# Altium PCB NPCarm.PcbDoc
Units mil, origin at the board's own origin, x right, y up, seen from the top; angles counter-clockwise.
Board outline 5790 x 5400 mil, 2 copper layers (Top Layer, Bottom Layer); 70 components, 41 nets, 201 pads, 381 vias.
Unrouted connection lines stored in the file: 1.
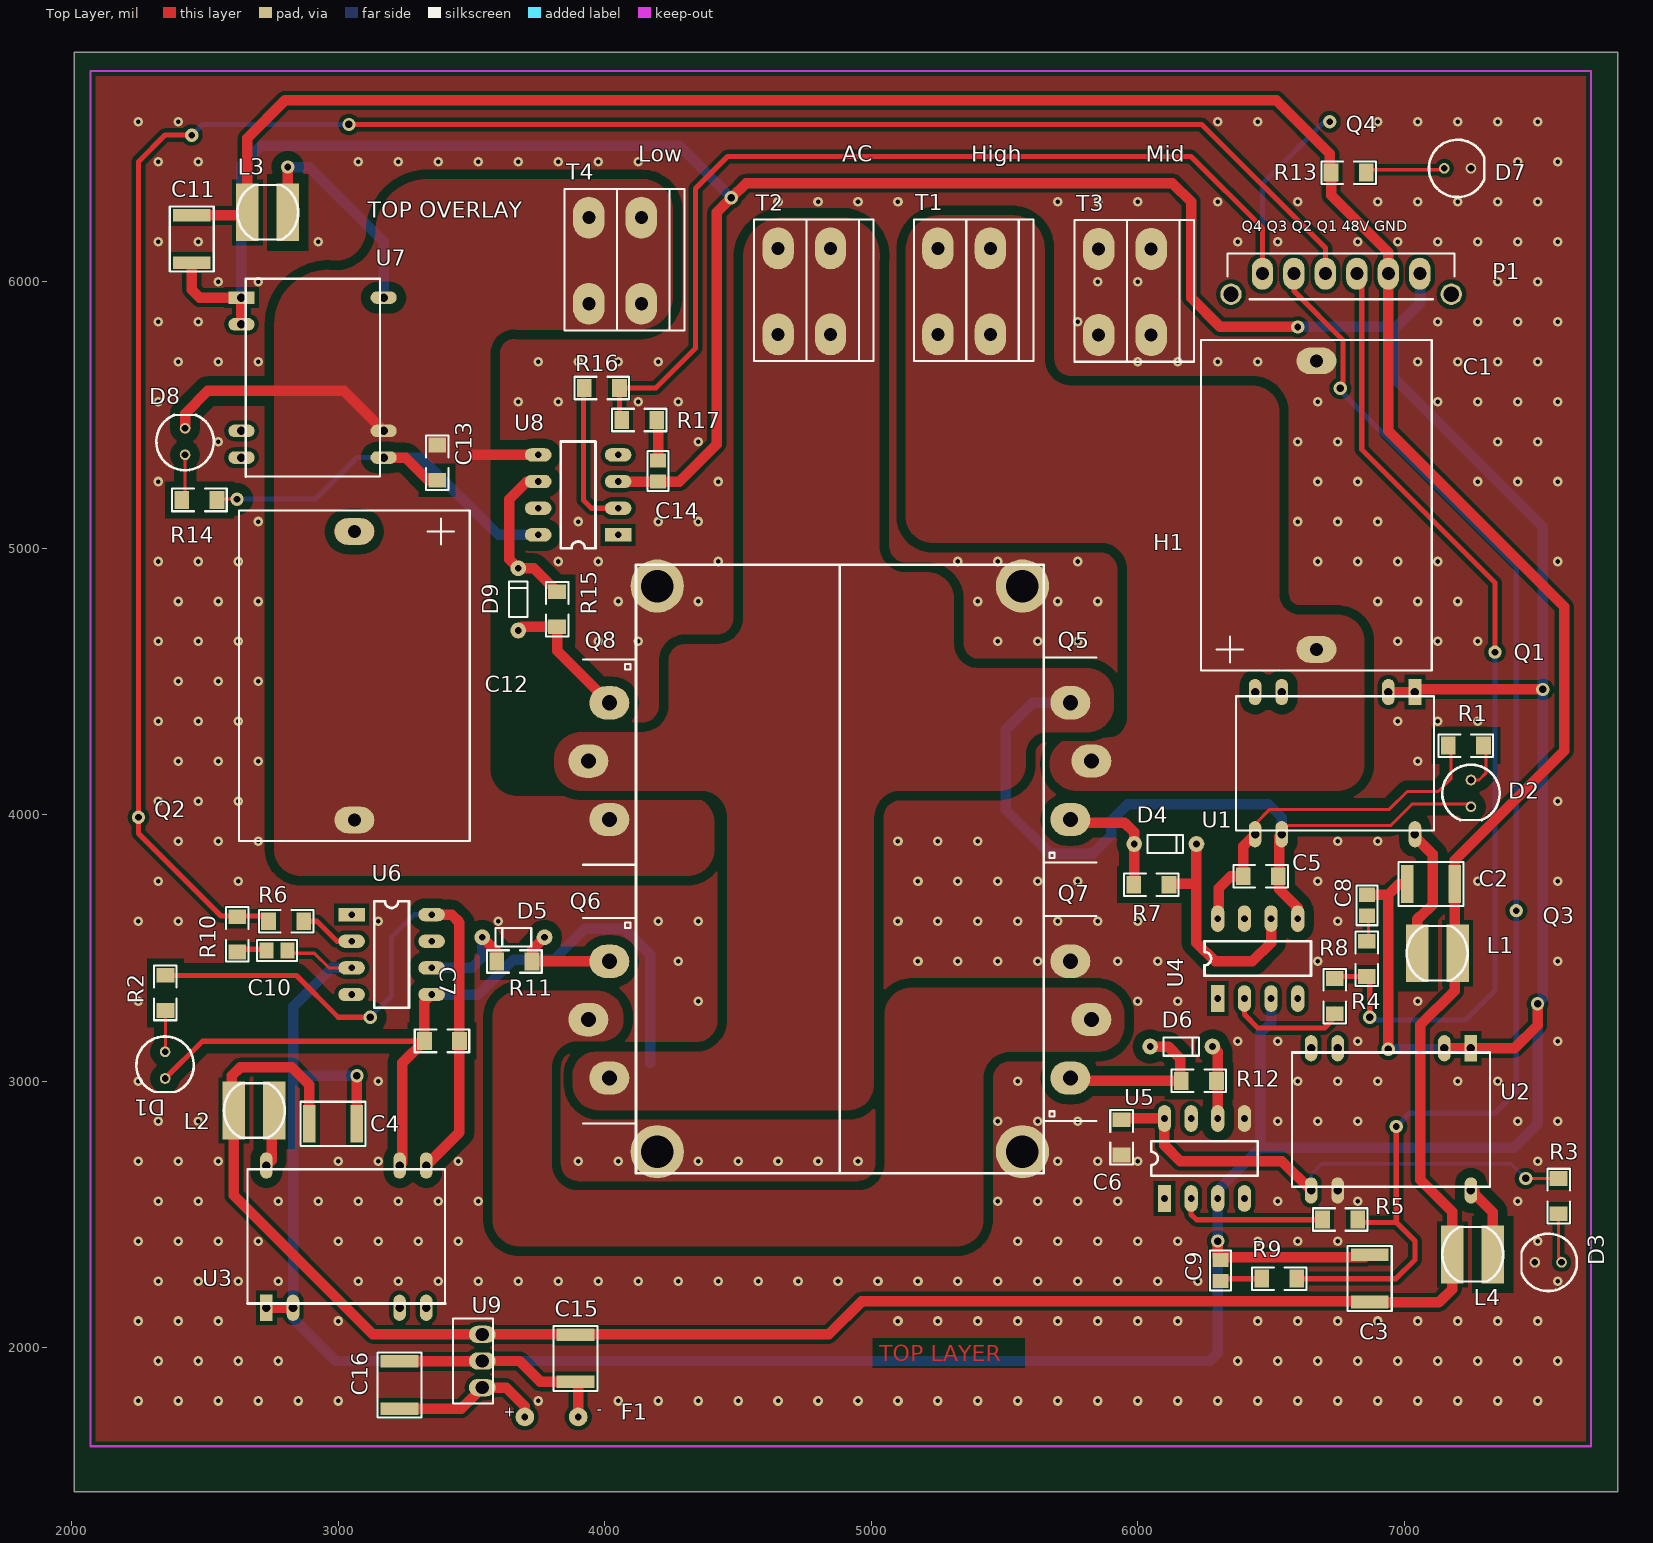
[diagram p0: Top Layer view]
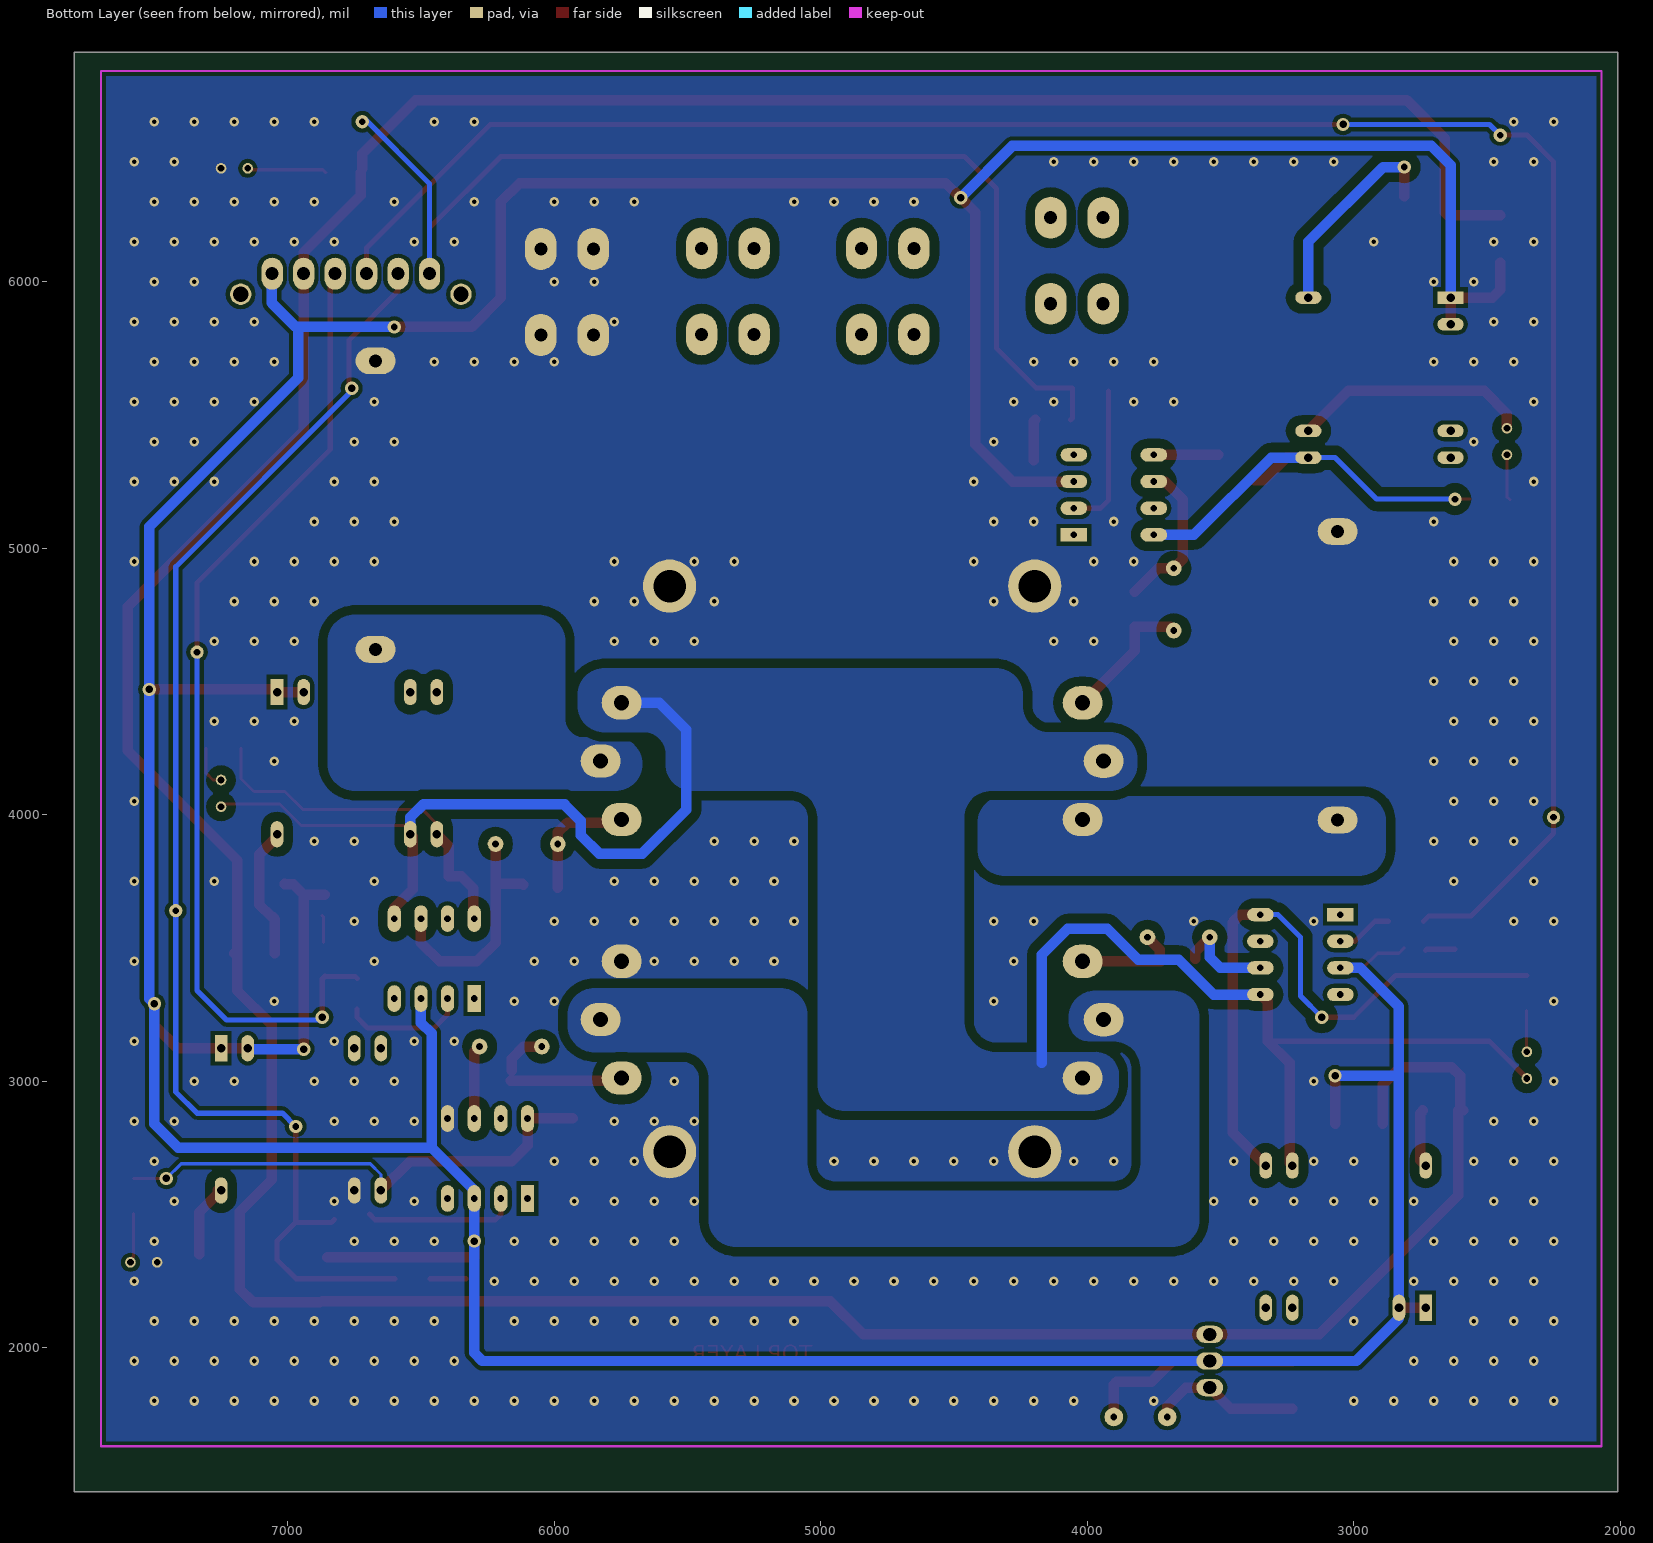
[diagram p1: Bottom Layer view, seen from below]

## Layer stack, top to bottom
Top Solder: solder mask 0.4, Solder Resist, Dk 3.5
Top Layer: signal copper 1.4
Dielectric 1: dielectric 12.6, FR-4, Dk 4.8
Bottom Layer: signal copper 1.4
Bottom Solder: solder mask 0.4, Solder Resist, Dk 3.5

## Board outline
2010,1460 7800,1460 7800,6860 2010,6860

## Design rules (kind name [scope] priority, off if disabled: settings)
BoardOutlineClearance [All] p1: gap=10 ignorepadtopadclearanceinfootprint=FALSE except(0: Arc-SplitContinuation Track-SplitContinuation SMDPad-SplitContinuation THPad-SplitContinuation Via-SplitContinuation Fill-SplitContinuation Poly-SplitContinuation Region-SplitContinuation Text-SplitContinuation)
Clearance ClearanceHV [InNetClass('HV')] p1: gap=35 ignorepadtopadclearanceinfootprint=FALSE except(0: Arc-Hole Track-Hole SMDPad-Hole THPad-Hole Via-Hole Fill-Hole Poly-Hole Region-Hole Text-Hole)
Clearance [All] p2: gap=15 ignorepadtopadclearanceinfootprint=FALSE except(0: Arc-Hole Track-Hole SMDPad-Hole THPad-Hole Via-Hole Fill-Hole Poly-Hole Region-Hole Text-Hole)
ComponentClearance [All] p1: gap=10 collisioncheckmode=3 verticalgap=100000 showdistances=FALSE
Height [All] p1: minheight=0 maxheight=30000 prefheight=500
HoleSize [All] p1: absolutevalues=TRUE maxlimit=500 minlimit=1 maxpercent=80.000 minpercent=20.000
PolygonConnect [All] p1: connectstyle=Direct reliefconductorwidth=10 reliefentries=4 polygonreliefangle="90 Angle" airgapwidth=10
RoutingVias [All] p1: holewidth=28 width=50 viastyle="Through Hole" minholewidth=10 minwidth=50 maxholewidth=50 maxwidth=100
SilkToSolderMaskClearance [IsPad] p1: minsilkscreentomaskgap=4 clearancetoexposedcopper=TRUE
SolderMaskExpansion [All] p1: expansion=4
Width [All] p1: maxlimit=40 minlimit=10 preferedwidth=10
26 further rules are at their usual default settings.

## Classes and differential pairs
net class HV: NetC1_1 NetC5_1 NetC5_2 NetC7_2 NetC12_2 NetC13_2 NetD1_1 NetD2_1 NetD4_1 NetD4_2 NetD5_1 NetD5_2 NetD6_1 NetD6_2 NetD8_1 NetD9_1 NetD9_2 NetL1_2 NetL2_2 NetL3_2 NetL4_2 NetQ6_2

## Components (designator, comment, footprint, x,y, rotation, side; value= is the part's Value field where it differs from the comment)
C1 "Cap Pol1" B32674D3126K000 6670,4620 r90 top
C2 "Cap" C4532 7100,3740 r0 top
C3 "Cap" C4532 6870,2260 r270 top
C4 "Cap" C4532 2980,2840 r180 top
C5 "Cap" R_1206 6460,3770 r90 top
C6 "Cap" R_1206 5940,2790 r0 top
C7 "Cap" R_1206 3390,3150 r270 top
C8 "Cap" "Capacitor 0805 - duplicate" 6860,3660 r270 top
C9 "Cap" "Capacitor 0805 - duplicate" 6310,2290 r270 top
C10 "Cap" "Capacitor 0805 - duplicate" 2770,3490 r180 top
C11 "Cap" C4532 2450,6160 r90 top
C12 "Cap Pol1" B32674D3126K000 3060,5062.68 r270 top
C13 "Cap" R_1206 3370,5320 r180 top
C14 "Cap" "Capacitor 0805 - duplicate" 4200,5290 r90 top
C15 "Cap" C4532 3890,1960 r90 top
C16 "Cap" C4532 3230,1860 r90 top
D1 "LED" LED 2350,3110 r270 top
D2 "LED" LED 7250,4130 r270 top
D3 "LED" LED 7590,2320 r180 top
D4 "1N4148" DO-35_02 6220,3924.45 r180 top
D5 "1N4148" DO-35_02 3540,3505.55 r0 top
D6 "1N4148" DO-35_02 6280,3164.45 r180 top
D7 "LED" LED 7150,6425 r0 top
D8 "LED" LED 2425,5350 r90 top
D9 "1N4148" DO-35_02 3640.55,4925 r270 top
F1 "12Fan" "12V Fan" 3700,1740 r0 top
H1 "Heatsink" "Dual C40" 5567,4858 r180 top
L1 "Inductor" TCK-047 7005.12,3590.24 r270 top
L2 "Inductor" TCK-047 2803.31,2779.76 r90 top
L3 "Inductor" TCK-047 2853.31,6149.76 r90 top
L4 "Inductor" TCK-047 7374.88,2239.76 r90 top
P1 "Header 6" "3.00mm Male Header" 6467.56,6030 r0 top
Q1 "Testpoint" Testpoint 7340,4610 r90 top
Q2 "Testpoint" Testpoint 2250,3990 r90 top
Q3 "Testpoint" Testpoint 7420,3640 r90 top
Q4 "Testpoint" Testpoint 6720,6600 r90 top
Q5 "IXFK 34N80" TO-247 5747,4420 r270 top
Q6 "IXFK 34N80" TO-247 4017,3012 r90 top
Q7 "IXFK 34N80" TO-247 5747,3450 r270 top
Q8 "IXFK 34N80" TO-247 4017,3982 r90 top
R1 "980" R_1206 7230,4260 r90 top
R2 "980" R_1206 2350,3330 r180 top
R3 "980" R_1206 7580,2570 r0 top
R4 "Value" R_1206 6740,3320 r0 top
R5 "Value" R_1206 6760,2480 r270 top
R6 "Value" R_1206 2803.07,3600.98 r90 top
R7 "1" R_1206 6049.74,3738.2 r90 top
R8 "Value" R_1206 6860,3460 r0 top
R9 "Value" R_1206 6530,2260 r90 top
R10 "Value" R_1206 2620,3550 r180 top
R11 "1" R_1206 3660,3450 r90 top
R12 "1" R_1206 6230,3000 r270 top
R13 "4.58k" R_1206 6790,6410 r90 top
R14 "980" R_1206 2480,5180 r270 top
R15 "1" R_1206 3820,4770 r180 top
R16 "Value" R_1206 3990,5600 r270 top
R17 "Value" R_1206 4130,5480 r270 top
T1 "1991095" "Terminal Pad" 5250,5802.17 r0 top
T2 "1991095" "Terminal Pad" 4650,5802.17 r0 top
T3 "1991095" "Terminal Pad" 5853.15,5800 r0 top
T4 "1991095" "Terminal Pad" 3940,5917.17 r0 top
U1 "TDR 3-4812" "PID DC-DC Converter - duplicate" 6440,3926.54 r90 top
U2 "TDR 3-4812" "PID DC-DC Converter - duplicate" 6650,2590 r90 top
U3 "TDR 3-4812" "PID DC-DC Converter - duplicate" 3330,2683.46 r270 top
U4 "TLP351H" 11-10C4S 6300,3310 r90 top
U5 "TLP351H" 11-10C4S 6100,2560 r90 top
U6 "TLP351H" 11-10C4S 3050,3625 r0 top
U7 "TDR 3-4812" "PID DC-DC Converter - duplicate" 3170,5340 r180 top
U8 "TLP351H" 11-10C4S 4050,5050 r180 top locked
U9 "R-78HB12-0.5" "R-78HB12-0.5 Footprint" 3540,2050 r270 top

## Footprints (in the part's own frame and the unit in brackets; to place one, negate y for a bottom-side part, rotate by r counter-clockwise, add the part's x,y. Pads: shape width x height; smd on the part's side, far side on the other; paste and mask are expansions set on the pad)
"3.00mm Male Header" [mil] "6 pin header"
  round 80 hole 57: 0(-118.11,-77.17) 0(708.66,-77.17)
  oval 80x120 hole 49: 1(590.55,0) 2(472.44,0) 3(354.33,0) 4(236.22,0) 5(118.11,0) 6(0,0)
  silkscreen extent -131,-96 721,76
11-10C4S [mil]
  rect 100x50 hole 25: 1(0,0)
  oval 100x50 hole 25: 2(0,-100) 3(0,-200) 4(0,-300) 5(300,-300) 6(300,-200) 7(300,-100) 8(300,0)
  silkscreen extent 85,-350 215,50
"12V Fan" [mil] "12V DC Fan"
  round 70 hole 25: 1(0,0) 2(200,0)
B32674D3126K000 [mil] "Film cap"
  oval 100x150 hole 49: 1(0,0) 2(1082.68,0)
  silkscreen extent -79,-433 1161,433
C4532 [mm]
  rect 1.2x3.6 smd: 1(-2.25,0) 2(2.25,0)
  silkscreen extent -3.1,-2.1 3.1,2.1
"Capacitor 0805 - duplicate" [mm]
  rect 1.35x1.55 smd: 1(-1,0) 2(1,0)
  silkscreen extent -1.9,-1 1.9,1
DO-35_02 [mm]
  round 1.5 hole 0.635: 1(0,0.875) 2(5.94,0.875)
  silkscreen extent 1.27,0 4.67,1.75
"Dual C40" [mil] "Heat sink for TO 247 case"
  round 200 hole 122: 1(0,0) 2(0,2123) 3(1370,2123) 4(1370,0)
  silkscreen extent -80,-80 1450,2203
LED [mil] "LED"
  round 40 hole 25: 1(0,0) 2(100,0)
  silkscreen extent -58,-108 150,108
"PID DC-DC Converter - duplicate" [mm]
  rect 2.5x1.2 hole 0.813: 1(13.55,-15.24)
  oval 2.5x1.2 hole 0.813: 2(13.55,-12.7) 6(13.55,-2.54) 7(13.55,0) 8(0,0) 9(0,-2.54) 14(0,-15.24)
  silkscreen extent 0.35,-17.04 13.15,1.8
"R-78HB12-0.5 Footprint" [mil] "Power Supply Footprint"
  oval 65x100 hole 49: 1(0,0) 2(100,0) 3(200,0)
  silkscreen extent -60,-110 260,40
R_1206 [mm]
  rect 1.7x1.4 smd: 1(-0.025,-1.7) 2(-0.025,1.65)
  silkscreen extent -1.1,-2.63 1.05,2.58, body extent -0.81,-1.68 0.8,1.68, height 1.1
TCK-047 [mm]
  rect 5.5x2.15 smd: 1(2.8,4.95) 2(2.8,1.1)
  silkscreen extent 0.2,0.1 5.4,5.9
"Terminal Pad" [mm]
  oval 3x4 hole 1.245: 1(0,0) 1(0,8.2) 2(5,0) 2(5,8.2)
  silkscreen extent -2.3,-2.55 9.1,10.95
Testpoint [mil]
  round 50 hole 25: 1(0,0)
TO-247 [mil] "MOSFET Package"
  oval 125x150 hole 57: 1(437.8,0) 2(218.9,78.74) 3(0,0)
  silkscreen extent -170,-100 600,98

## Part data
C1 C12: "Polarized Capacitor (Radial)"
C2 C3 C4 C5 C6 C7 C8 C9 C10 C11 C13 C14 C15 C16: "Capacitor"
D4 D5 D6 D9: "Diode"
H1: library part "C-40 Heatsink", "Dual C-40 Heatsink"
P1: "Header, 6-Pin"
Q5 Q6 Q7 Q8: "MOSFET 34A"
R1 R2 R3 R4 R5 R6 R7 R8 R9 R10 R11 R12 R13 R14 R15 R16 R17: library part RES_SMD1, "RES SMD 1% 1/4W 1206"
T1 T2 T3 T4: library part "Terminal Block 2", "2 way terminal block"
U1 U2 U3 U7: "48V-12V Converter"
U4 U5 U6 U8: "Photocoupler Driver"

## Via types
v1: diameter 36, hole 17, Top Layer to Bottom Layer, 365 vias
v2: diameter 50, hole 28, Top Layer to Bottom Layer, 11 vias
v3: diameter 50, hole 25, Top Layer to Bottom Layer, 5 vias

## Nets (pads, with @x,y where several pads share a name; then routed paths per layer and width w, separated by ;. In a path a pad name is that pad's centre, name@x,y a point inside that pad or via, vN(x,y) a via of type N, cw(c..) or ccw(c..) an arc to the next point about the centre after c; other vN are vias at no path point)
12V: C6.2 R3.2 U2.8 U5.8 | length 1918.8
  Top Layer w11.81: v2(7455.04,2634.96) R3.2
  Top Layer w39.37: C6.2@5930,2860 U5.8 6100,2760 6160,2700 6540,2700 U2.8
  Bottom Layer w11.81: U2.8 6650,2650 6690,2690 7400,2690 v2(7455.04,2634.96)
48V: C2.2 C3.2 C4.2 C11.2 C15.2 L1.1 L2.1 L3.1 L4.1 P1.2 R13.2 U9.1 | length 15373.5
  Top Layer w39.37: C11.2 2647.01,6248.58 L3.1 2658.43,6538.43 2800,6680 6520,6680 6720,6480 R13.2@6720,6423.15 ; L2.1@2588.43,2890 2600,2901.57 2600,3020 2632.95,3052.95 2824.97,3052.95 2891.42,2986.51 C4.2 ; L2.1 2608.43,2571.57 3130,2050 U9.1 4840,2050 4965,2175 C3.2@6870,2175 ; R13.2 6725.04,6324.96 6940,6110 6940,5440 7600,4780 7600,4240 7188.58,3828.58 C2.2 L1.1@7188.58,3491.42 ; C3.2@6881.42,2170 7130,2170 7180,2220 L4.1 7180,2510 7060,2630 7060,3211.42 7188.58,3340 L1.1@7188.58,3491.42 ; L1.1 L1.1@7188.58,3491.42
GND: C1.2 C6.1 C12.1 D3.2 D7.2 H1.1 H1.2 H1.3 H1.4 Q7.3 T3.1 T3.2 U2.9 U5.5
  other v1: 2250,1800 2400,1800 2550,1800 2700,1800 2850,1800 3000,1800 3750,1800 4050,1800 4200,1800 4350,1800 4500,1800 4650,1800 4800,1800 4950,1800 5100,1800 5250,1800 5400,1800 5550,1800 5700,1800 5850,1800 6000,1800 6150,1800 6300,1800 6450,1800 6600,1800 6750,1800 6900,1800 7050,1800 7200,1800 7350,1800 7500,1800 2325,1950 2475,1950 2625,1950 2775,1950 6375,1950 6525,1950 6675,1950 6825,1950 6975,1950 7125,1950 7275,1950 7425,1950 7575,1950 2250,2100 2400,2100 2550,2100 3000,2100 5100,2100 5250,2100 5400,2100 5550,2100 5700,2100 5850,2100 6000,2100 6150,2100 6450,2100 6600,2100 6750,2100 6900,2100 7050,2100 7200,2100 7350,2100 7500,2100 2325,2250 2475,2250 2625,2250 2775,2250 3075,2250 3225,2250 3375,2250 3525,2250 3675,2250 3825,2250 3975,2250 4125,2250 4275,2250 4425,2250 4575,2250 4725,2250 4875,2250 5025,2250 5175,2250 5325,2250 5475,2250 5625,2250 5775,2250 5925,2250 6075,2250 6225,2250 7575,2250 2250,2400 2400,2400 2550,2400 2700,2400 3000,2400 3150,2400 3300,2400 3450,2400 5550,2400 5700,2400 5850,2400 6000,2400 6150,2400 6450,2400 6600,2400 6750,2400 7500,2400 2325,2550 2475,2550 2775,2550 2925,2550 3075,2550 3225,2550 3375,2550 3525,2550 5475,2550 5625,2550 5775,2550 5925,2550 6525,2550 6825,2550 7425,2550 2250,2700 2400,2700 2550,2700 3000,2700 3150,2700 3450,2700 3900,2700 4050,2700 4350,2700 4500,2700 4650,2700 4800,2700 4950,2700 5700,2700 5850,2700 6000,2700 7500,2700 2325,2850 2475,2850 5475,2850 5625,2850 5775,2850 6525,2850 6675,2850 6825,2850 7425,2850 7575,2850 2250,3000 3150,3000 5550,3000 6600,3000 6750,3000 6900,3000 7200,3000 7350,3000 6375,3150 6525,3150 6825,3150 7575,3150 2250,3300 4350,3300 6000,3300 6150,3300 7050,3300 4275,3450 5175,3450 5325,3450 5475,3450 5625,3450 5925,3450 6075,3450 6675,3450 7575,3450 2250,3600 2400,3600 3150,3600 3600,3600 4200,3600 4350,3600 5100,3600 5250,3600 5400,3600 5550,3600 5700,3600 5850,3600 6000,3600 6750,3600 2325,3750 2625,3750 5175,3750 5325,3750 5475,3750 5625,3750 5775,3750 6675,3750 7275,3750 7575,3750 2400,3900 2550,3900 2700,3900 5100,3900 5250,3900 5400,3900 6750,3900 6900,3900 2325,4050 2475,4050 2625,4050 7575,4050 2400,4200 2550,4200 2700,4200 7050,4200 2325,4350 2475,4350 2625,4350 6975,4350 7125,4350 7275,4350 2400,4500 2550,4500 2700,4500 2325,4650 2475,4650 2625,4650 3975,4650 4125,4650 5475,4650 5625,4650 5775,4650 6975,4650 7125,4650 7275,4650 2400,4800 2550,4800 2700,4800 4050,4800 4350,4800 5400,4800 5700,4800 5850,4800 6900,4800 7050,4800 7200,4800 2325,4950 2475,4950 2625,4950 3825,4950 3975,4950 4425,4950 5325,4950 5475,4950 5775,4950 6675,4950 6825,4950 6975,4950 7125,4950 7575,4950 2700,5100 3900,5100 4200,5100 4350,5100 6600,5100 6750,5100 6900,5100 2325,5250 4425,5250 6675,5250 6825,5250 7275,5250 7425,5250 7575,5250 2550,5400 4350,5400 6600,5400 6750,5400 7350,5400 7500,5400 2325,5550 3675,5550 3825,5550 4125,5550 4275,5550 6675,5550 7125,5550 7275,5550 7425,5550 7575,5550 2400,5700 2550,5700 2700,5700 3750,5700 3900,5700 4050,5700 4200,5700 6000,5700 6150,5700 6300,5700 6450,5700 7050,5700 7200,5700 7350,5700 7500,5700 2325,5850 2475,5850 5775,5850 7125,5850 7275,5850 7425,5850 7575,5850 2550,6000 2700,6000 5850,6000 6000,6000 7350,6000 7500,6000 2325,6150 2475,6150 2925,6150 6375,6150 6525,6150 6825,6150 6975,6150 7125,6150 7275,6150 7425,6150 7575,6150 4650,6300 4800,6300 4950,6300 5100,6300 5700,6300 5850,6300 6000,6300 6300,6300 6600,6300 6900,6300 7050,6300 7200,6300 7350,6300 7500,6300 2325,6450 2475,6450 3075,6450 3225,6450 3375,6450 3525,6450 3675,6450 3825,6450 3975,6450 4125,6450 7425,6450 7575,6450 2250,6600 2400,6600 6300,6600 6450,6600 6900,6600 7050,6600 7200,6600 7350,6600 7500,6600
NetC1_1: C1.1 Q5.2 T1.1 T1.2
NetC5_1: C5.1 C7.1 D1.2 D2.2 Q5.3 Q6.3 Q8.2 T2.1 T2.2 U1.9 U3.9 U4.5 U6.5 | length 6106.2
  Top Layer w11.81: U1.9@6540,3950 6550,3960 6950,3960 7030,4040 7240,4040 D2.2
  Top Layer w19.68: D1.2 2490,3150 C7.1@3322.09,3150
  Top Layer w39.37: U3.9 3240,2693.46 3240,3070 3242.09,3070 3322.09,3150 C7.1 3323.07,3298.07 U6.5 ; U1.9 6530,3916.54 6530,3720 6600,3650 U4.5 U4.5@6600,3580
  Bottom Layer w39.37: U6.5 3525,3325 3655.79,3455.79 3808.74,3455.79 3925.46,3572.51 4072.51,3572.51 4170,3475.02 4170,3070 ; Q5.3 5606,4420 5504,4318 5504,4019 5670.44,3852.56 5830,3852.56 5900,3922.56 5900,3976.28 5960,4036.28 5960,4040 6490,4040 6540,3990 U1.9
NetC5_2: C5.2 R1.2 U1.8 U4.8 | length 1361.9
  Top Layer w11.81: U1.8 6440,3965 6495,4020 6943.8,4020 7010.61,4086.81 7126.81,4086.81 7175.04,4135.04 R1.2@7175.04,4249.02
  Top Layer w39.37: U4.8 6304.21,3610 6304.21,3724.21 6349.02,3769.02 C5.2 6395.04,3881.57 U1.8
NetC7_2: C7.2 R2.1 U3.8 U6.8 | length 2432.8
  Top Layer w19.68: R2.1 2843.07,3396.93 3000,3240 v2(3120,3240)
  Top Layer w39.37: U3.8 3454.69,2808.15 3454.69,3595.31 3425,3625 U6.8
  Bottom Layer w19.68: v2(3120,3240) 3200,3320 3200,3540 3285,3625 U6.8
NetC8_2: C8.2 R8.2 | length 101.7
  Top Layer w11.81: R8.2@6864.96,3520.98 6864.96,3615.59 C8.2@6870,3620.63
NetC9_2: C9.2 R9.2 | length 133.4
  Top Layer w19.68: C9.2@6331.61,2259.02 R9.2
NetC10_2: C10.2 R10.2 | length 111.7
  Top Layer w19.68: R10.2@2620.98,3495.04 2725.59,3495.04 C10.2
NetC12_2: C12.2 C13.1 D8.2 Q8.3 T4.1 T4.2 U7.9 U8.5 | length 1139.1
  Top Layer w39.37: D8.2 2425,5505 2510,5590 3020,5590 U7.9 ; 3508.29,5350 U8.5
NetC13_2: C13.2 R14.2 U7.8 U8.8 | length 1606.8
  Top Layer w11.81: R14.2@2564.06,5184.06 v3(2620,5184.06)
  Top Layer w39.37: U7.8 3252.83,5340 3337.8,5255.04 C13.2
  Bottom Layer w19.68: v3(2620,5184.06) 2914.06,5184.06 3070,5340 U7.8
  Bottom Layer w39.37: U7.8 3310,5340 3600,5050 U8.8
NetC14_2: C14.2 R17.2 | length 153.7
  Top Layer w39.37: R17.2 4200,5475.94 C14.2
NetC16_1: C16.1 F1.1 U9.3 | length 571.5
  Top Layer w39.37: C16.1 3461.42,1771.42 U9.3 3630,1850 3700,1780 F1.1
NetD1_1: D1.1 R2.2 | length 155.4
  Top Layer w11.81: D1.1 2350.98,3110.98 R2.2
NetD2_1: D2.1 R1.1 | length 160.2
  Top Layer w11.81: D2.1 7280,4130 7306.93,4156.93 R1.1@7306.93,4249.02
NetD3_1: D3.1 R3.1 | length 170.5
  Top Layer w11.81: R3.1 7579.02,2340.98 D3.1@7585,2335
NetD4_1: D4.1 R7.1 U4.6 | length 852.5
  Top Layer w39.37: R7.1 6119.45,3740 6220,3740 ; D4.1 6220,3740 ; 6500,3560 6500,3520 6430,3450 6290,3450 6220,3520 6220,3740
NetD4_2: D4.2 Q5.1 R7.2 | length 485.6
  Top Layer w39.37: Q5.1@5759.8,3995 Q5.1 5759.2,3970 5950,3970 5986.14,3933.86 D4.2 R7.2@5986.14,3725.55
NetD5_1: D5.1 R11.2 U6.6 | length 385.4
  Top Layer w39.37: D5.1 3595.04,3484.96 R11.2@3595.04,3459.02
  Bottom Layer w39.37: U6.6 3500,3425 3540,3465 D5.1
NetD5_2: D5.2 Q6.1 R11.1 | length 393.5
  Top Layer w39.37: R11.1@3723.95,3449.8 Q6.1 ; R11.1@3726.93,3459.02 3726.93,3493.07 D5.2
NetD6_1: D6.1 R12.2 U5.6 | length 278.3
  Top Layer w39.37: D6.1 6300,3110 U5.6
NetD6_2: D6.2 Q7.1 R12.1 | length 597.6
  Top Layer w39.37: Q7.1 5758.22,3000.98 R12.1 ; D6.2 6113.94,3130 6160,3083.94 6160,3040
NetD7_1: D7.1 R13.1 | length 299.7
  Top Layer w11.81: R13.1 6867.91,6420 7145,6420 D7.1
NetD8_1: D8.1 R14.1 | length 174
  Top Layer w11.81: R14.1 2425,5192.91 D8.1
NetD9_1: D9.1 R15.1 U8.6 | length 591
  Top Layer w39.37: U8.6 3707.49,5250 3641.73,5184.25 3641.73,4958.27 D9.1 3732.91,4925 R15.1
NetD9_2: D9.2 Q8.1 R15.2 | length 518.2
  Top Layer w39.37: D9.2 3688.9,4705.04 R15.2 3820.98,4615.81 Q8.1
NetL1_2: L1.2 U1.14 | length 489.5
  Top Layer w39.37: U1.14@7040,3916.54 7105.91,3850.63 7105.91,3662.66 7057.69,3614.45 7054.45,3614.45 7048.43,3608.43 L1.2
NetL2_2: L2.2 U3.14 | length 219
  Top Layer w39.37: U3.14 2750,2703.46 2750,2880 L2.2@2740,2890
NetL3_2: L3.2 U7.14 | length 796
  Top Layer w39.37: L3.2@2810,6320 v3(2810,6430)
  Bottom Layer w39.37: v3(2810,6430) 2890,6430 3170,6150 U7.14
NetL4_2: L4.2 U2.14 | length 268.4
  Top Layer w39.37: U2.14@7262.95,2590 7262.95,2577.05 7331.57,2508.43 L4.2
NetQ6_2: Q6.2 Q7.2
NetR4_1: R4.1 U4.2 | length 467.3
  Top Layer w19.68: U4.2 6400,3250 6450,3200 6700,3200 6740,3240 R4.1@6740,3270
NetR5_1: R5.1 U5.2 | length 570
  Top Layer w19.68: U5.2 6200,2500 6220,2480 6672.09,2480 R5.1@6693.07,2500.98
NetR6_1: R6.1 U6.2 | length 211.1
  Top Layer w19.68: R6.1 2920,3600 2995,3525 U6.2
NetR16_1: R16.1 U8.2 | length 552.4
  Top Layer w19.68: R16.1@3920,5590 3920,5180 3950,5150 U8.2
Q1: P1.3 Q1.1 R4.2 R8.1 | length 3705.9
  Top Layer w19.68: R4.2 6747.13,3393.07 R8.1 ; P1.3 6840,6011.89 6840,5370 7340,4870 Q1.1 ; R8.1@6860,3394.06 6870,3384.06 v2(6870,3240)
  Bottom Layer w19.68: v2(6870,3240) 6880,3230 7230,3230 7340,3340 Q1.1
Q2: P1.4 Q2.1 R6.2 R10.1 | length 7944.9
  Top Layer w19.68: v3(2450,6550) 2350,6550 2250,6450 Q2.1 2250,3930 2560,3620 2718.11,3620 R6.2 ; v2(3040,6590) 6240,6590 6703.78,6126.22 P1.4
  Bottom Layer w19.68: v3(2450,6550) 2490,6590 v2(3040,6590)
Q3: P1.5 Q3.1 R5.2 R9.1 | length 5074.6
  Top Layer w19.68: P1.5 6585.67,5964.33 6770,5780 v2@6770,5600 ; R9.1 6969.02,2259.02 7040,2330 7040,2400 6970,2470 ; R5.2 6835.94,2470 6970,2470 ; v3(6970,2830) 6970,2470
  Bottom Layer w19.68: v2(6760,5600) 6760,5590 7420,4930 Q3.1 7420,2960 7340,2880 7020,2880 v3(6970,2830)
Q4: P1.6 Q4.1 R16.2 R17.1 | length 4211.1
  Top Layer w19.68: R17.1 4054.96,5489.09 R16.2 4190.98,5600.98 4340,5750 4340,6350 4460,6470 6200,6470 6467.56,6202.44 P1.6
  Bottom Layer w19.68: P1.6 6467.56,6367.56 Q4.1@6710,6610
SigGND: C2.1 C3.1 C4.1 C8.1 C9.1 C10.1 C11.1 C14.1 C15.1 C16.2 F1.2 P1.1 U1.1 U1.2 U2.1 U2.2 U3.1 U3.2 U4.3 U5.3 U6.3 U7.1 U7.2 U8.3 U9.2 | length 22380
  Top Layer w11.81: C10.1@2810,3500 2830,3480 2910,3480 2965,3425 U6.3
  Top Layer w39.37: C11.1 2450,5970 2480,5940 U7.1 U7.2 ; U3.1 U3.2 ; C4.1 3068.58,3018.58 v2(3070,3020) ; C16.2 3538.58,1948.58 U9.2 3680,1950 3758.58,1871.42 C15.1 3900,1861.42 3900,1750 F1.2@3910,1740 ; U8.3 4280,5250 4420,5390 4420,6260 v2(4475,6315) 4530,6370 6130,6370 6200,6300 6200,5940 6310,5830 v3(6600,5830) ; v2@6300,2390 6300,2340 C3.1@6851.42,2340 ; C8.1@6860,3700 6940,3700 ; v2(6940,3120) 6940,3700 ; U1.2 U1.1 7050,4470 v2(7520,4470) ; C2.1 7010.79,3739.37 6979.37,3739.37 6940,3700 ; U2.2 U2.1 7413.46,3123.46 7500,3210 v2(7500,3290)
  Bottom Layer w39.37: U7.1 2636.54,6436.54 2709.69,6509.69 4280.31,6509.69 v2(4475,6315) ; U6.3 2975,3425 2830,3280 2830,3030 ; v2(3070,3020) 2840,3020 2830,3030 ; U4.3 6500,3220 6460,3180 6460,2750 ; v3(6600,5830) 6960,5830 ; v2(6940,3120) 7146.54,3120 U2.2 U2.2@7143.46,3130 ; P1.1 7060,6028.11 7060,5920 6970,5830 6960,5830 ; 2830,3030 U3.2 2830,2110 2990,1950 U9.2 6269.37,1950 6300,1980.63 v2(6300,2400) U5.3 6300,2590 6460,2750 ; 6460,2750 7410,2750 7500,2840 v2(7500,3290) 7520,3310 v2(7520,4470) 7520,5080 6960,5640 6960,5830
pads on no net: P1.0 U1.6 U1.7 U2.6 U2.7 U3.6 U3.7 U4.1 U4.4 U4.7 U5.1 U5.4 U5.7 U6.1 U6.4 U6.7 U7.6 U7.7 U8.1 U8.4 U8.7

## Polygon pours and split planes (outlines as drawn)
GND on Top Layer "gnd_top" (solid, remove dead copper, pour order 72): 1460,7320 8500,7320 8500,6420 8500,1260 1490,1260
NetC12_2 on Top Layer "Top Layer-No Net" (solid, pour order 34): 4255,6270 ccw(c4140.01,6270) 4140,6385 3330,6385 ccw(c3337.49,6187.51) 3140,6180 cw(c2989.62,6194.01) 2965,6045 ccw(c2964.97,5840.03) 2760,5840 2760,3870 ccw(c2860,3870) 2860,3770 3680,3770 ccw(c3680,3870) 3780,3870 3780,4010 ccw(c3720.01,4010.01) 3720,4070 3670,4070 cw(c3670,4170) 3570,4170 3570,5740 cw(c3660,5730) 3670,5820 4140,5820 ccw(c4127.5,5947.5) 4255,5960
NetC5_1 on Top Layer "Top Layer-No Net" (solid, pour order 8): 5480,4090 ccw(c5480,4190) 5580,4190 5580,4230 cw(c5660,4230) 5660,4310 5810,4310 ccw(c5810,4410) 5910,4410 5910,4450 ccw(c5810,4450) 5810,4550 4340,4550 ccw(c4340,4450) 4240,4450 4240,4410 cw(c4140,4410) 4140,4310 3910,4310 ccw(c3910,4210) 3810,4210 3810,4190 ccw(c3910,4190) 3910,4090
NetC12_2 on Top Layer "Top Layer-No Net" (solid, pour order 20): 2970,4070 ccw(c2970,3980) 2880,3980 2880,3870 ccw(c2980,3870) 2980,3770 4310,3770 ccw(c4310,3870) 4410,3870 4410,3970 ccw(c4310,3970) 4310,4070
NetC1_1 on Top Layer "Top Layer-No Net" (solid, pour order 28): 5530,6250 cw(c5525,6125) 5650,6120 5650,5710 ccw(c5750,5710) 5750,5610 6430,5610 cw(c6430,5510) 6530,5510 6530,4390 ccw(c6630,4390) 6630,4290 6680,4290 6680,4130 5840,4130 cw(c5840,4190) 5780,4190 5790,4190 ccw(c5790,4290) 5890,4290 ccw(c5890,4360) 5960,4360 5960,4920 ccw(c5860,4920) 5860,5020 5230,5020 cw(c5230,5120) 5130,5120 5130,6120 cw(c5260,6120) 5260,6250
NetC5_1 on Top Layer "Top Layer-No Net" (solid, pour order 30): 4910,6240 cw(c4885,6095) 5030,6070 5030,5010 ccw(c5130,5010) 5130,4910 5210,4910 cw(c5210,4810) 5310,4810 5310,4640 ccw(c5400,4640) 5400,4550 5500,4550 5500,4530 cw(c5400,4530) 5400,4430 4240,4430 4240,4580 cw(c4300,4580) 4300,4640 4420,4640 ccw(c4420,4740) 4520,4740 4520,6070 cw(c4670,6090) 4650,6240
NetC1_1 on Top Layer "Top Layer-No Net" (solid, pour order 38): 6750,4090 ccw(c6750,4190) 6850,4190 6850,4650 ccw(c6750,4650) 6750,4750 6060,4750 ccw(c6060,4650) 5960,4650 5960,4360.97 cw(c5889.03,4360.97) 5889.03,4290 5770,4290 ccw(c5770,4190) 5670,4190 ccw(c5770,4190) 5770,4090
NetC1_1 on Top Layer "Top Layer-No Net" (solid, pour order 40): 6610,4750 cw(c6610,4830) 6530,4830 6530,4860 6420,4860 ccw(c6420,4760) 6320,4760 6320,4710 ccw(c6420,4710) 6420,4610 6560,4610 ccw(c6560,4700) 6650,4700
NetC5_1 on Top Layer "Top Layer-No Net" (solid, pour order 16): 4910,2890 ccw(c4910,2990) 5010,2990 5010,3990 cw(c5110,3990) 5110,4090 5150,4090 ccw(c5150,4160) 5220,4160 5220,4180 4290,4180 cw(c4290,4200) 4270,4200 4270,4140 ccw(c4320,4140) 4320,4090 4360,4090 cw(c4360,3990) 4460,3990 4460,3230 cw(c4340,3230) 4340,3110 3970,3110 ccw(c3965,3025) 3880,3030 3880,2990 ccw(c3980,2990) 3980,2890
NetQ6_2 on Top Layer "Top Layer-No Net" (solid, pour order 18): 3990,3150 ccw(c3990,3230) 4070,3230 4070,3240 ccw(c3970,3240) 3970,3340 3680,3340 ccw(c3680,3240) 3580,3240 3580,2480 ccw(c3680,2480) 3680,2380 5320,2380 ccw(c5320,2480) 5420,2480 5420,3010 cw(c5520,3010) 5520,3110 5850,3110 ccw(c5850,3210) 5950,3210 5950,3250 ccw(c5850,3250) 5850,3350 5150,3350 ccw(c5150,3250) 5050,3250 5050,2690 cw(c4950,2690) 4950,2590 3900,2590 cw(c3900,2690) 3800,2690 3800,3050 cw(c3900,3050) 3900,3150
GND on Bottom Layer "gnd_bottom" (solid, remove dead copper, pour order 74): 1730,7070 8080,7070 8080,5230 8080,1260 1720,1260
NetC5_1 on Bottom Layer "Top Layer-No Net" (solid, pour order 44): 5481.74,4089.1 ccw(c5481.74,4189.1) 5581.74,4189.1 5581.74,4229.1 cw(c5661.74,4229.1) 5661.74,4309.1 5811.74,4309.1 ccw(c5811.74,4409.1) 5911.74,4409.1 5911.74,4449.1 ccw(c5811.74,4449.1) 5811.74,4549.1 4341.74,4549.1 ccw(c4341.74,4449.1) 4241.74,4449.1 4241.74,4409.1 cw(c4141.74,4409.1) 4141.74,4309.1 3911.74,4309.1 ccw(c3911.74,4209.1) 3811.74,4209.1 3811.74,4189.1 ccw(c3911.74,4189.1) 3911.74,4089.1
NetC5_1 on Bottom Layer "Top Layer-No Net" (solid, pour order 42): 4911.74,2889.1 ccw(c4911.74,2989.1) 5011.74,2989.1 5011.74,3989.1 cw(c5111.74,3989.1) 5111.74,4089.1 5151.74,4089.1 ccw(c5151.74,4159.1) 5221.74,4159.1 5221.74,4179.1 4291.74,4179.1 cw(c4291.74,4199.1) 4271.74,4199.1 4271.74,4139.1 ccw(c4321.74,4139.1) 4321.74,4089.1 4361.74,4089.1 cw(c4361.74,3989.1) 4461.74,3989.1 4461.74,3229.1 cw(c4341.74,3229.1) 4341.74,3109.1 3971.74,3109.1 ccw(c3966.74,3024.1) 3881.74,3029.1 3881.74,2989.1 ccw(c3981.74,2989.1) 3981.74,2889.1
NetQ6_2 on Bottom Layer "Top Layer-No Net" (solid, pour order 46): 3989.74,3149.1 ccw(c3989.74,3229.1) 4069.74,3229.1 4069.74,3239.1 ccw(c3969.74,3239.1) 3969.74,3339.1 3679.74,3339.1 ccw(c3679.74,3239.1) 3579.74,3239.1 3579.74,2479.1 ccw(c3679.74,2479.1) 3679.74,2379.1 5319.74,2379.1 ccw(c5319.74,2479.1) 5419.74,2479.1 5419.74,3009.1 cw(c5519.74,3009.1) 5519.74,3109.1 5849.74,3109.1 ccw(c5849.74,3209.1) 5949.74,3209.1 5949.74,3249.1 ccw(c5849.74,3249.1) 5849.74,3349.1 5149.74,3349.1 ccw(c5149.74,3249.1) 5049.74,3249.1 5049.74,2689.1 cw(c4949.74,2689.1) 4949.74,2589.1 3899.74,2589.1 cw(c3899.74,2689.1) 3799.74,2689.1 3799.74,3049.1 cw(c3899.74,3049.1) 3899.74,3149.1
NetC12_2 on Bottom Layer "Top Layer-No Net" (solid, pour order 48): 2970,4070 ccw(c2970,3980) 2880,3980 2880,3870 ccw(c2980,3870) 2980,3770 4310,3770 ccw(c4310,3870) 4410,3870 4410,3970 ccw(c4310,3970) 4310,4070
NetC1_1 on Bottom Layer "Top Layer-No Net" (solid, pour order 50): 6749.08,4089.94 ccw(c6749.08,4189.94) 6849.08,4189.94 6849.08,4649.94 ccw(c6749.08,4649.94) 6749.08,4749.94 6059.08,4749.94 ccw(c6059.08,4649.94) 5959.08,4649.94 5959.08,4360.91 cw(c5888.11,4360.91) 5888.11,4289.94 5769.08,4289.94 ccw(c5769.08,4189.94) 5669.08,4189.94 ccw(c5769.08,4189.94) 5769.08,4089.94

## Keep-outs
Keep-Out Layer:
  lines w7.87: 2070,1770 2070,6690 2070,6790 7700,6790 7700,6690 ; 2070,1790 2070,1630 7700,1630 7700,6690 ; 7700,1770 7700,6690

## Other copper
Top Layer:
  pour cut-out: 5790,4050 6010,3830 6300,3830 6500,4030 6460,4070 5760,4070
  pour cut-out: 7150,4330 7310,4330 7310,4170 7175.04,4170
  pour cut-out: 3889.45,4899.49 3599.49,4899.49 3590,4890 3590,4650 3630,4610 3830,4610 3860,4640 3871.97,4628.03 3886.77,4628.03 3886.77,4896.8
  text "TOP LAYER" at 5030,1950 h60

## Silkscreen, mask and mechanical layers (free items; w line width, h text height)
Top Overlay:
  text "Low" at 4125,6450 h60
  text "AC" at 4890,6450 h60
  text "High" at 5375,6450 h60
  text "Mid" at 6030,6450 h60
  text "TOP OVERLAY" at 3110,6240 h60
  text "Q4 Q3 Q2 Q1 48V GND" at 6390,6190 h40

## Text inside footprints (layer, text, board x,y; h text height)
F1: Top Overlay "+" at 3620,1740 h40; Top Overlay "-" at 3970,1750 h40